# Altium PCB PCB2.PcbDoc
Units mil, origin at the board's own origin, x right, y up, seen from the top; angles counter-clockwise.
Board outline 6000 x 4000 mil, 2 copper layers (Top Layer, Bottom Layer); 7 components, 6 nets, 20 pads, 0 vias.
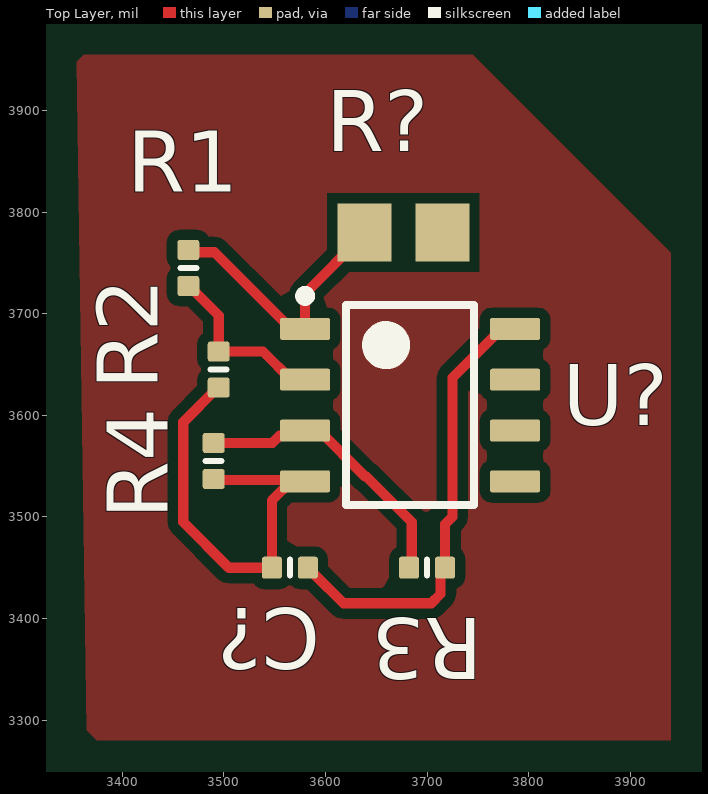
[diagram p0: Top Layer view]
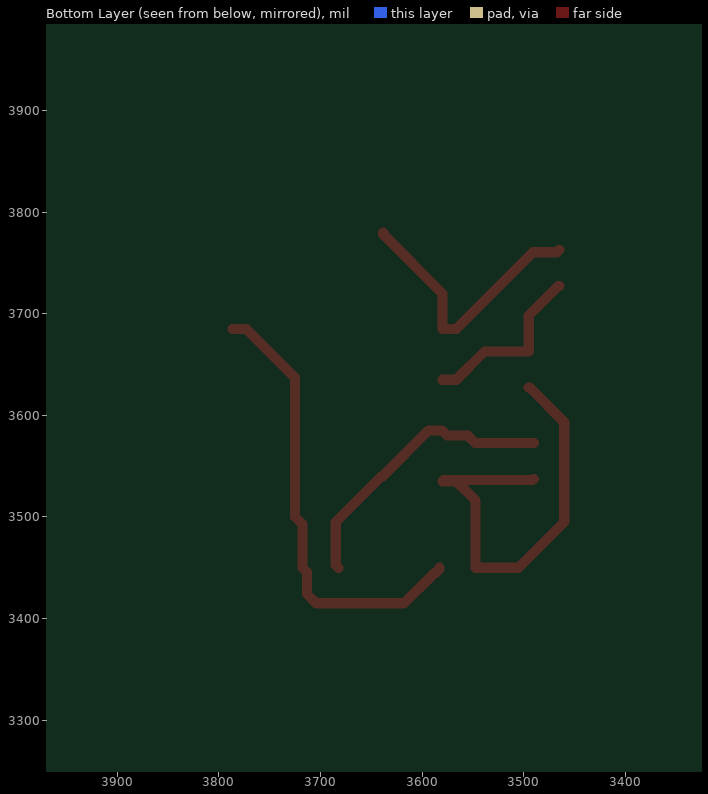
[diagram p1: Bottom Layer view, seen from below]
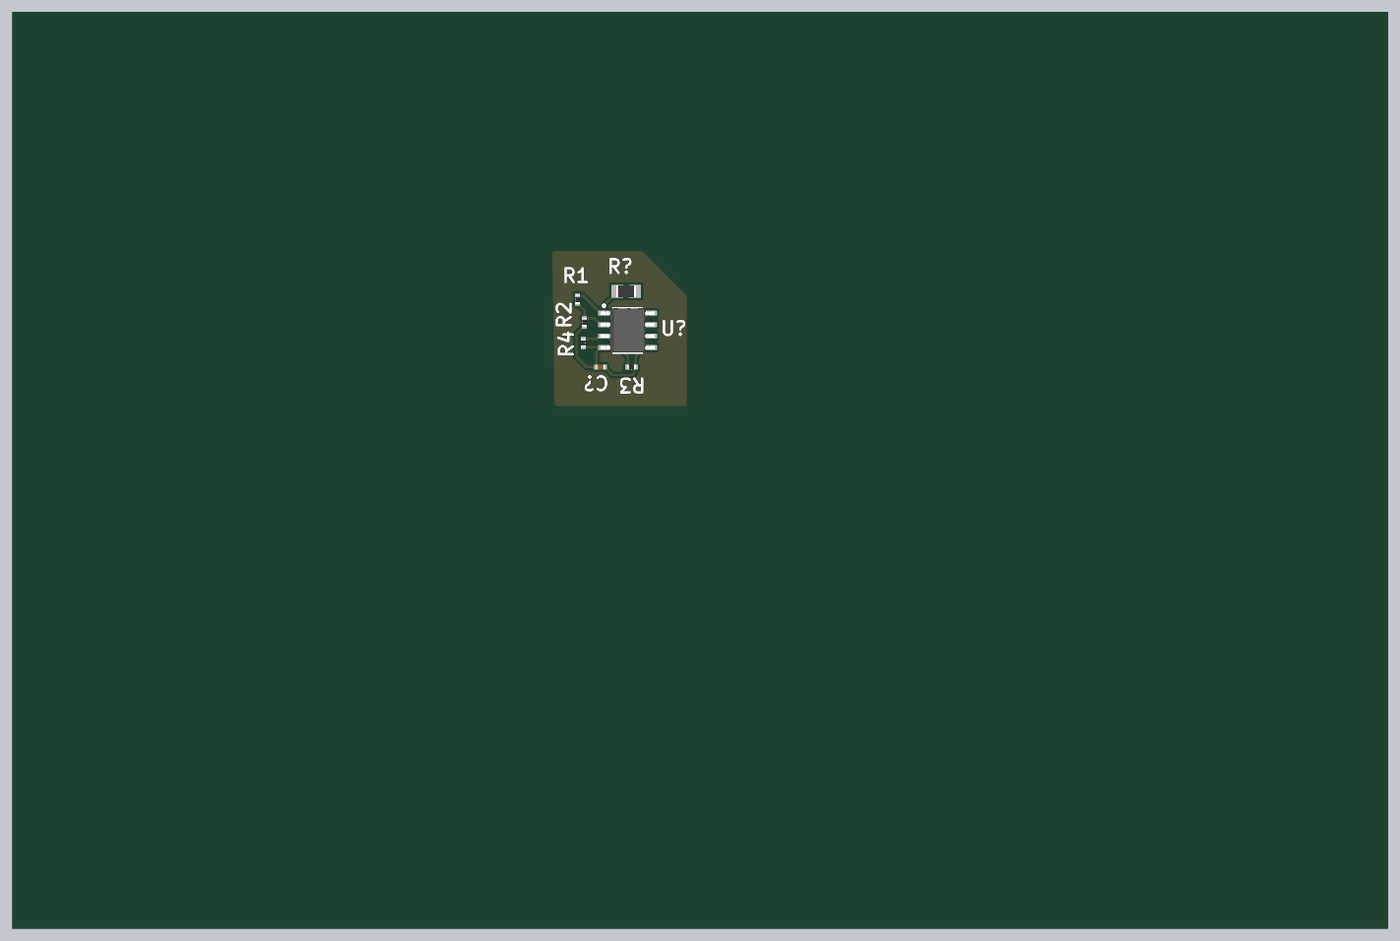
[diagram p2: 3D render of the assembled board from above, using the file's embedded part models]

## Layer stack, top to bottom
Top Solder: solder mask 0.4, Solder Resist, Dk 3.5
Top Layer: signal copper 1.4
Dielectric 1: dielectric 12.6, FR-4, Dk 4.8
Bottom Layer: signal copper 1.4
Bottom Solder: solder mask 0.4, Solder Resist, Dk 3.5

## Board outline
1000,1000 7000,1000 7000,5000 1000,5000

## Design rules (kind name [scope] priority, off if disabled: settings)
Clearance [All] p1: gap=10 ignorepadtopadclearanceinfootprint=FALSE
PolygonConnect [All] p1: connectstyle=Relief reliefconductorwidth=10 reliefentries=4 polygonreliefangle="90 Angle" airgapwidth=10
RoutingVias [All] p1: holewidth=28 width=50 viastyle="Through Hole" minholewidth=28 minwidth=50 maxholewidth=28 maxwidth=50
SolderMaskExpansion [All] p1: expansion=0 istentingtop=FALSE
SupplyNets "Schematic Supply Nets_1" [InNet('+5')] p1: voltage=0.000
SupplyNets "Schematic Supply Nets" [InNet('GND')] p2: voltage=0.000
Width [All] p1: maxlimit=10 minlimit=10 preferedwidth=10
30 further rules are at their usual default settings.

## Components (designator, comment, footprint, x,y, rotation, side; value= is the part's Value field where it differs from the comment)
C? "Capacitor 100nF +/-20% 50V 0402" CAPC0402(1005)60_L 3565,3450 r180 top value=100nF
R1 "Resistor 10K  +/-1 % 0402 63 mW" RESC0402(1005)_L 3465,3745 r90 top value=10k
R2 "Resistor 10K  +/-1 % 0402 63 mW" RESC0402(1005)_L 3495,3645 r90 top value=10k
R3 "Resistor 10K  +/-1 % 0402 63 mW" RESC0402(1005)_L 3700,3450 r0 top value=10k
R4 "Resistor 10K  +/-1 % 0402 63 mW" RESC0402(1005)_L 3490,3555 r270 top value=10k
R? "Resistor 1k +/-1% 0805 125 mW" RESC2013X70X40ML20T20 3676.61,3780 r0 top value=1k
U? "LM358DR" D0008A_L 3683.35,3610 r0 top

## Footprints (in the part's own frame and the unit in brackets; to place one, negate y for a bottom-side part, rotate by r counter-clockwise, add the part's x,y. Pads: shape width x height; smd on the part's side, far side on the other; paste and mask are expansions set on the pad)
CAPC0402(1005)60_L [mm] "Chip Capacitor, Body 1.0x0.5mm, Height 0.6mm, IPC High Density"
  rrect25% 0.5x0.55 smd: 1(-0.45,0) 2(0.45,0)
  silkscreen extent 0,-0.2 0,0.2, body extent -0.5,-0.25 0.5,0.25, height 0.6
D0008A_L [mm] "SOIC, 8-Leads, Body 5x4mm, Pitch 1.27mm, IPC High Density"
  rrect18% 1.25x0.55 smd: 1(-2.625,1.905) 2(-2.625,0.635) 3(-2.625,-0.635) 4(-2.625,-1.905) 5(2.625,-1.905) 6(2.625,-0.635) 7(2.625,0.635) 8(2.625,1.905)
  silkscreen extent -2.75,-2.5 1.6,2.85, body extent -3,-2.45 3,2.45, height 1.63
RESC0402(1005)_L [mm] "Chip Resistor, Body 1.0x0.5mm, IPC High Density"
  rrect25% 0.5x0.55 smd: 1(-0.45,0) 2(0.45,0)
  silkscreen extent 0,-0.2 0,0.2, body extent -0.5,-0.25 0.5,0.25, height 0.3
RESC2013X70X40ML20T20 [mm] "Chip Resistor, 2-Leads, Body 2.2x1.35mm, IPC Low Density"
  rect 1.35x1.45 smd: 1(-0.975,0) 2(0.975,0)
  body extent -1.1,-0.67 1.1,0.67, height 0.7

## Part data
C?: library part CMP-001-00067-3, "Chip Capacitor, 100nF +/-20%, 50V, 0402, Thickness 0.6 mm", Case/Package=0402, Max Operating Temperature=85°C, Min Operating Temperature=-55°C, Tolerance=10%, Voltage Rating=50V, Mounting Technology=SMT, Pins=2
R1 R2 R3 R4: library part CMP-009-00149-3, "Chip Resistor, 10 kOhms, +/-1 %, 63 mW, -55 to 125 degC, 0402", Case/Package=0402, Max Operating Temperature=155°C, Min Operating Temperature=-55°C, Power=63mW, Tolerance=1%, Pins=2
R?: library part CMP-009-00010-5, "Chip Resistor, 1 KOhm, +/- 1%, 0.125 W, -55 to 155 degC, 0805 (2013 Metric)", Case/Package=0805, Max Operating Temperature=155°C, Min Operating Temperature=-55°C, Power=125mW, Tolerance=1%, Voltage Rating=150V, Mounting Technology=SM, Pins=2, RoHS Compliant=True
U?: library part CMP-014-00024-2, "Dual Operational Amplifier, 3 to 32 V, 0 to 70 degC, 8-Pin SOIC (D), Green (RoHS & no Sb/Br), Tape and Reel", Case/Package=SOIC, Manufacturer="Texas Instruments (TI)", Max Dual Supply Voltage=16V, Max Operating Temperature=70°C, Min Dual Supply Voltage=1.5V, Min Operating Temperature=0°C, Nominal Dual Supply Voltage=12V, Nominal Supply Current=1.2mA, Nominal Voltage Gain=100dB, Output Current=30mA, Package Description="8-Pin Small Outline Integrated Circuit, Body 4.9 x 3.9 mm, Pitch 1.27 mm", Package Quantity=1, Package Reference=D0008A, Package Version="4040047-3/M, 06/2011", Channels=2, Common Mode Rejection Ratio=65dB, Datasheet URL=http://www.ti.com/lit/ds/symlink/lm358.pdf, Datasheet Version="SLOS068T, 04/2015", Manufacturer URL=http://www.ti.com/, Max Supply Voltage=16V, Min Supply Voltage=1.5V, Mounting Technology=SM, Nominal Gain Bandwith Product=700KHz, Nominal Supply Voltage=12V, Package URL=http://www.ti.com/lit/ml/msoi002j/msoi002j.pdf, Packaging=CutTape, Pins=8, RoHS Compliant=True, Slew Rate=0.3V/us, Unity Gain Bandwidth Product=700KHz

## Nets (pads, with @x,y where several pads share a name; then routed paths per layer and width w, separated by ;. In a path a pad name is that pad's centre, name@x,y a point inside that pad or via, vN(x,y) a via of type N, cw(c..) or ccw(c..) an arc to the next point about the centre after c; other vN are vias at no path point)
+5: C?.1 R3.2 U?.8 | length 448.8
  Top Layer w10: C?.1 3582.72,3449.02 3587.56,3444.17 3588.54,3444.17 3617.72,3415 3704.14,3415 3713.32,3424.17 3713.32,3445.6 R3.2 3717.72,3492.72 3725,3500 3725,3637.09 3772.91,3685 U?.8
GND: C?.2 R2.1 R4.2 U?.4 | length 450.8
  Top Layer w10: R4.2 3491.14,3536.14 3578.86,3536.14 U?.4 3566.22,3535 3547.28,3516.06 C?.2 3505,3450 3460,3495 3460,3593.27 3494.02,3627.28 R2.1
NetD?_2: R?.2
NetR1_1: R1.1 R2.2 U?.2 | length 174.1
  Top Layer w10: R1.1 3465.98,3727.28 3495,3698.27 R2.2 3538.5,3662.72 3566.22,3635 U?.2
NetR1_2: R1.2 R?.1 U?.1 | length 266.3
  Top Layer w10: R1.2 3467.32,3760.39 3490.83,3760.39 3566.22,3685 U?.1 3580,3719.8 3638.23,3778.03 R?.1
NetR3_1: R3.1 R4.1 U?.3 | length 283.5
  Top Layer w10: R4.1 3547.72,3572.72 3555,3580 3575,3580 U?.3 3593.78,3585 3639.19,3539.59 3640.41,3539.59 3685,3495 3685,3452.72 R3.1
pads on no net: U?.5 U?.6 U?.7

## Polygon pours and split planes (outlines as drawn)
no net on Top Layer "NONET_L01_P003" (solid, pour order 3): 3355,3955 3745,3955 3940,3760 3940,3280 3375,3280 3365,3290